# Altium PCB PCB1.PcbDoc (part 1 of 5)
Units mil, origin at the board's own origin, x right, y up, seen from the top; angles counter-clockwise.
Board outline 1280 x 1960 mil, 2 copper layers (Top Layer, Bottom Layer); 43 components, 63 nets, 300 pads, 93 vias.
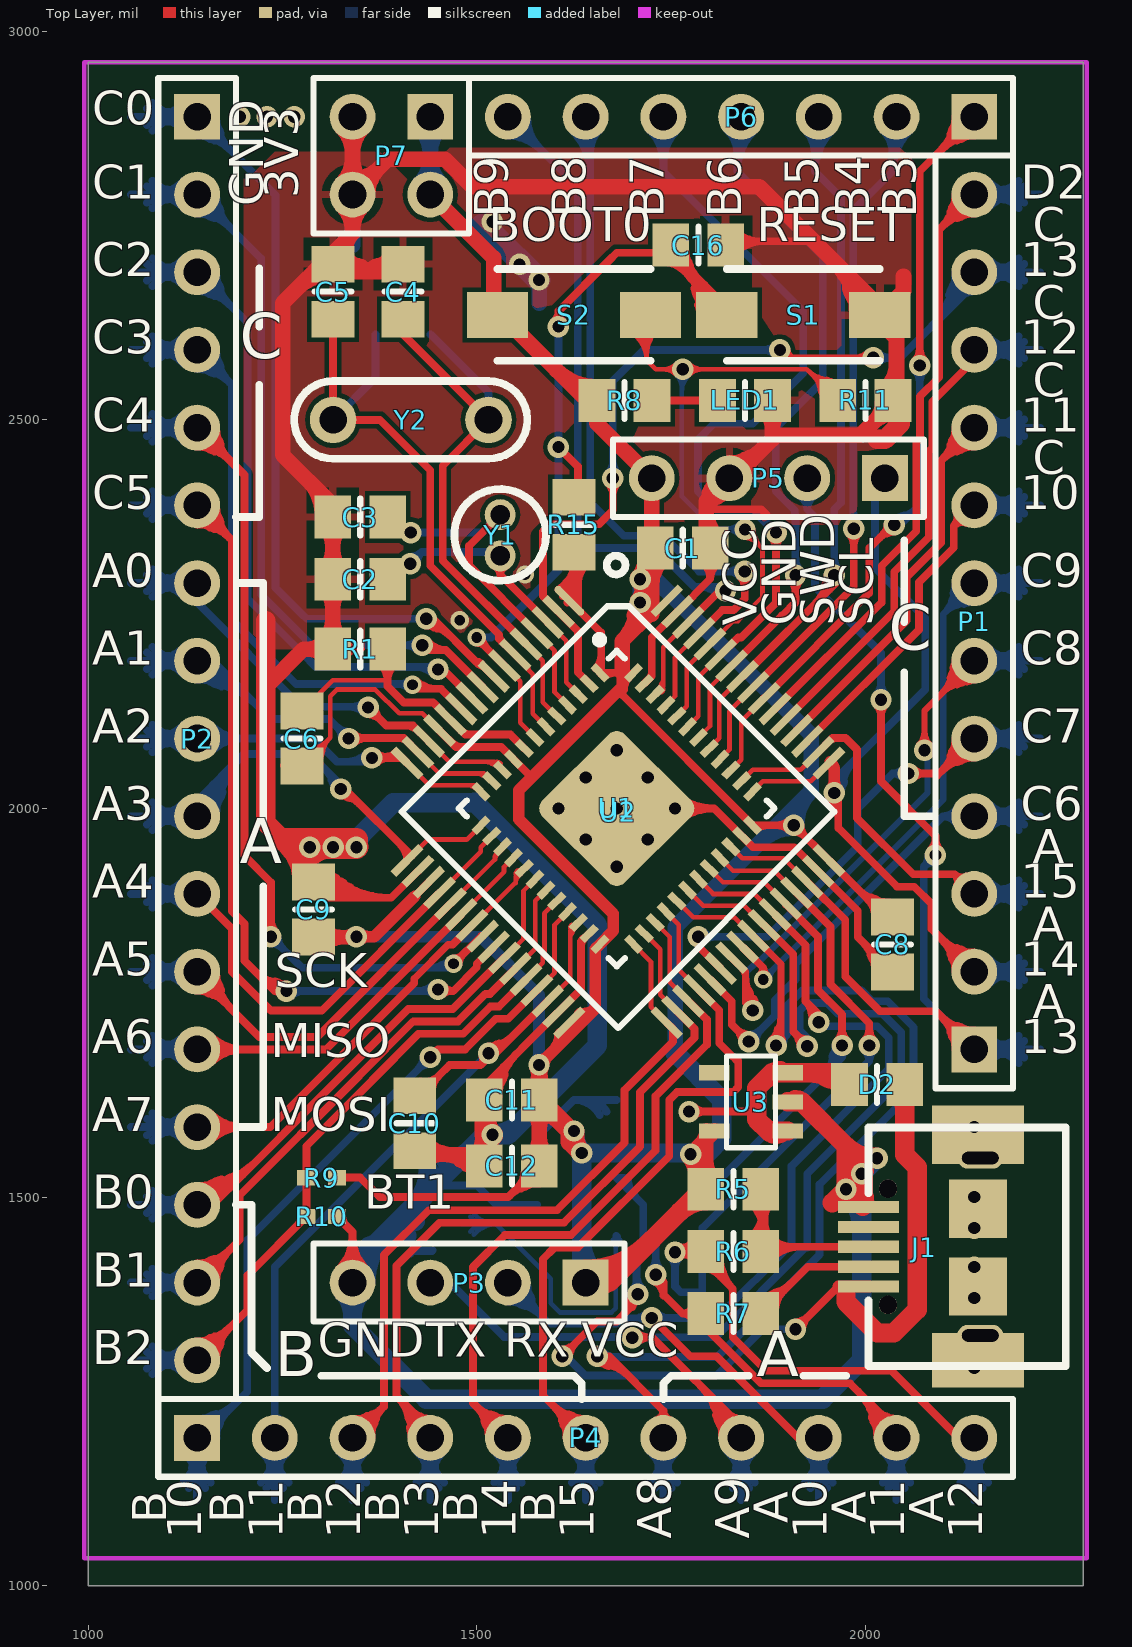
[diagram p0: Top Layer view]
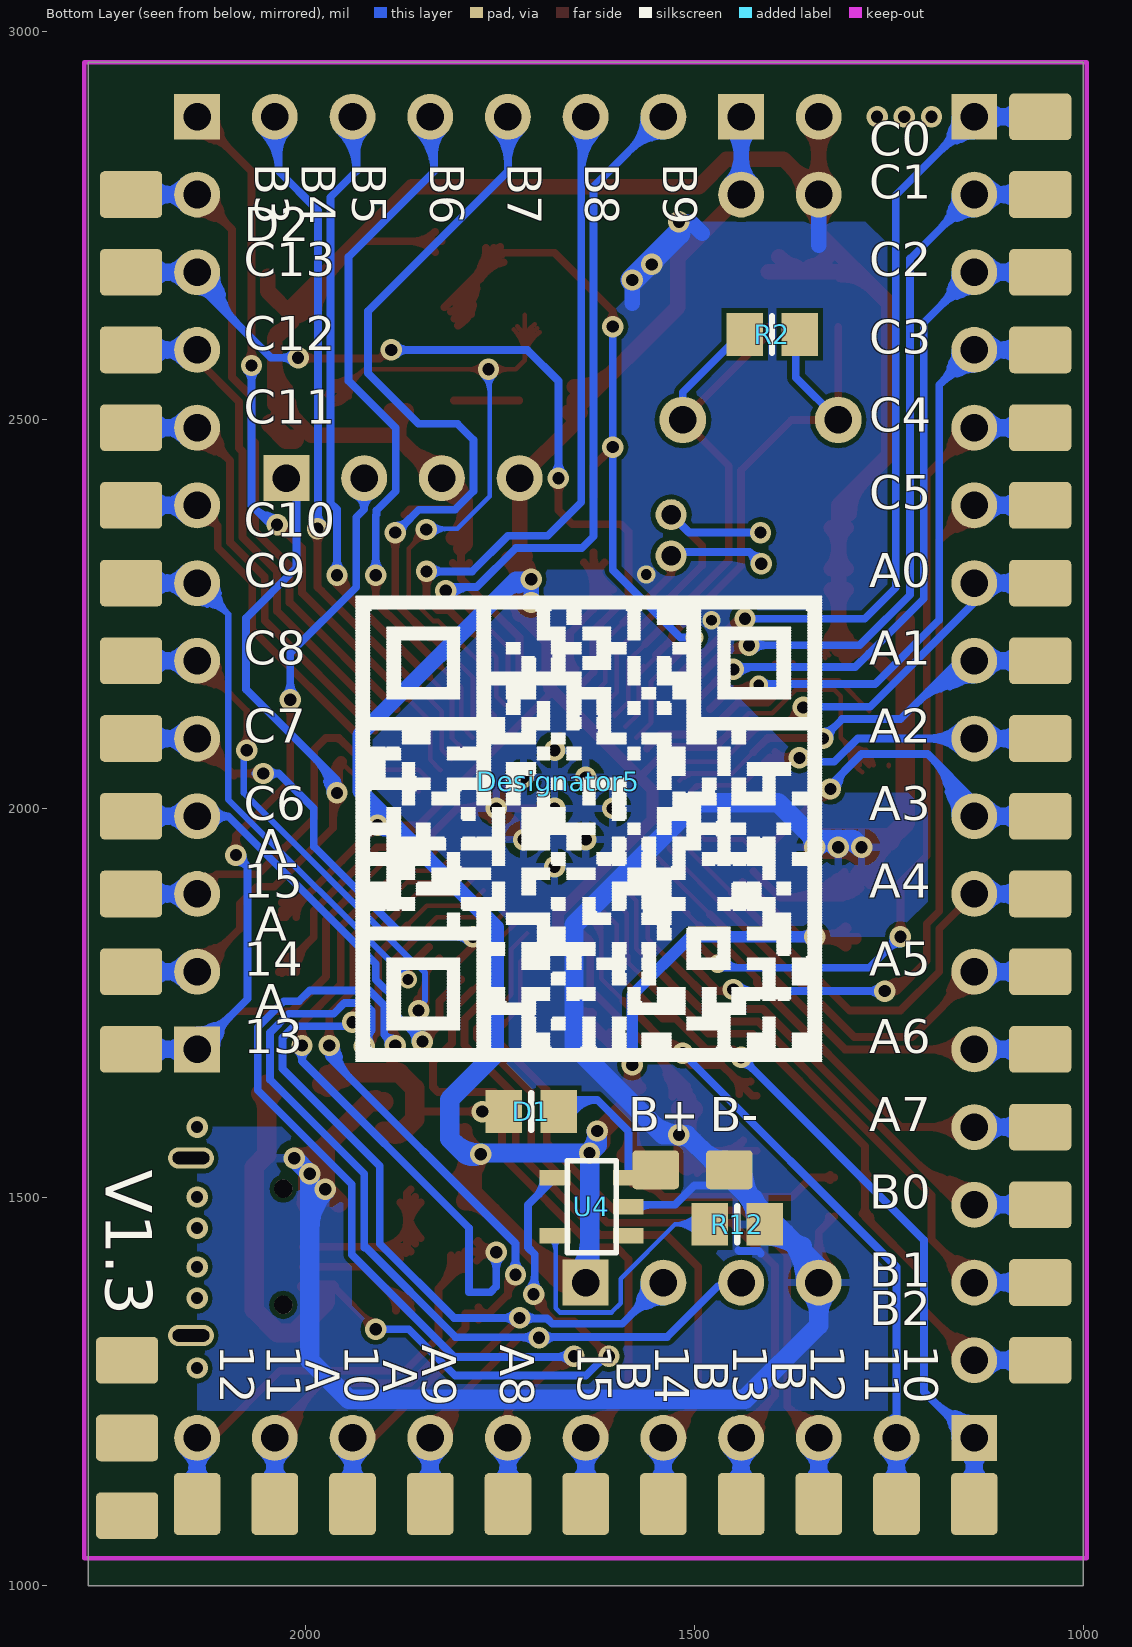
[diagram p1: Bottom Layer view, seen from below]

## Layer stack, top to bottom
Top Solder: solder mask 0.4, Solder Resist, Dk 3.5
Top Layer: signal copper 1.4
Dielectric 1: dielectric 12.6, FR-4, Dk 4.8
Bottom Layer: signal copper 1.4
Bottom Solder: solder mask 0.4, Solder Resist, Dk 3.5

## Board outline
1000,1000 2280,1000 2280,2960 1000,2960

## Design rules (kind name [scope] priority, off if disabled: settings)
Clearance [All] p1: gap=6
PolygonConnect [All] p1: connectstyle=Relief reliefconductorwidth=10 reliefentries=4 polygonreliefangle="90 Angle" airgapwidth=10
RoutingVias [All] p1: holewidth=15.75 width=27.56 viastyle="Through Hole" minholewidth=11.81 minwidth=23.62 maxholewidth=28 maxwidth=50
SolderMaskExpansion [All] p1: expansion=4
Width [All] p1: maxlimit=30 minlimit=6 preferedwidth=8
29 further rules are at their usual default settings.

## Components (designator, comment, footprint, x,y, rotation, side; value= is the part's Value field where it differs from the comment)
C1 "Cap" 6-0805_N 1765,2335 r0 top
C2 "Cap" 6-0805_N 1350,2295 r0 top
C3 "Cap" 6-0805_N 1350,2375 r0 top
C4 "Cap" 6-0805_N 1405,2665 r270 top
C5 "Cap" 6-0805_N 1315,2665 r270 top
C6 "Cap" 6-0805_N 1275,2090 r90 top
C8 "Cap" 6-0805_N 2035,1825 r270 top
C9 "Cap" 6-0805_N 1290,1870 r90 top
C10 "Cap" 6-0805_N 1420,1595 r90 top
C11 "Cap" 6-0805_N 1545,1625 r180 top
C12 "Cap" 6-0805_N 1545,1540 r180 top
C16 "Cap" 6-0805_N 1785,2725 r0 top
D1 "Diode" 6-0805_N 1710,1610 r0 bottom
D2 "Diode" 6-0805_N 2015,1645 r180 top
Designator5 "Comment" 二维码 1675,2035 r180 bottom
J1 "USB_M" usb-micro插 2120,1435 r270 top
LED1 "LED" 6-0805_N 1845,2525 r0 top
P1 "Header 12" HDR1X12 2140,1690 r90 top
P2 "Header 17" HDR1X17 1140,2890 r270 top
P3 "Header 4" HDR1X4 1640,1390 r180 top
P4 "Header 11" HDR1X11 1140,1190 r0 top
P5 "Header 4" HDR1X4 2025,2425 r180 top
P6 "Header 7" HDR1X7 2140,2890 r180 top
P7 "Header 2X2" HDR2X2 1440,2890 r180 top
R1 "0" 6-0805_N 1350,2205 r180 top
R2 "Res2" 6-0805_N 1400,2610 r180 bottom
R5 "Res2" 6-0805_N 1830,1510 r180 top
R6 "Res2" 6-0805_N 1830,1430 r0 top
R7 "Res2" 6-0805_N 1830,1350 r0 top
R8 "Res2" 6-0805_N 1690,2525 r0 top
R9 "Res2" 0402 1300.31,1525 r180 top
R10 "Res2" 0402 1300.31,1475 r180 top
R11 "Res2" 6-0805_N 2000,2525 r0 top
R12 "Res2" 6-0805_N 1445,1465 r0 bottom
R15 "Res2" 6-0805_N 1625,2365 r90 top
S1 "SW-PB" key 1920,2635 r180 top
S2 "SW-PB" key 1625,2635 r180 top
U1 "stm32f401ccu6" qfn48精简 1680,2000 r315 top
U2 "STM32F103RCT6" lqfd64正常 1665,1995 r315 top
U3 "ldo3.3v" sot23_5 1850,1625 r270 top
U4 "充电管理" sot23_5 1635,1490 r270 bottom
Y1 "33.768K" XTAL_32.768 1530,2325 r90 top
Y2 "8M" 晶振2 1415,2500 r0 top

## Footprints (in the part's own frame and the unit in brackets; to place one, negate y for a bottom-side part, rotate by r counter-clockwise, add the part's x,y. Pads: shape width x height; smd on the part's side, far side on the other; paste and mask are expansions set on the pad)
6-0805_N [mm] "Chip Resistor, Body 2.0x1.2mm, IPC Medium Density"
  rect 1.2x1.4 smd: 1(-0.9,0) 2(0.9,0)
  silkscreen extent 0,-0.6 0,0.6, body extent -1.07,-0.7 1.07,0.7, height 0.7
0402 [mm] "Chip Capacitor, Body 1.0x0.5mm, IPC High Density"
  rect 0.6x0.5 smd: 1(-0.5,0) 2(0.5,0)
  body extent -0.55,-0.3 0.55,0.3, height 1.3
HDR1X4 [mm] "Connector; Header; 4 Position"
  rect 1.5x1.5 hole 0.9: 1(0,0)
  round 1.5 hole 0.9: 2(2.54,0) 3(5.08,0) 4(7.62,0)
  silkscreen extent -1.27,-1.27 8.89,1.27
HDR1X7 [mm] "Connector; Header; 7 Position"
  rect 1.5x1.5 hole 0.9: 1(0,0)
  round 1.5 hole 0.9: 2(2.54,0) 3(5.08,0) 4(7.62,0) 5(10.16,0) 6(12.7,0) 7(15.24,0)
  silkscreen extent -1.27,-1.27 16.51,1.27
HDR1X11 [mm] "Connector; Header; 11 Position"
  rect 1.5x1.5 hole 0.9: 1(0,0)
  round 1.5 hole 0.9: 2(2.54,0) 3(5.08,0) 4(7.62,0) 5(10.16,0) 6(12.7,0) 7(15.24,0) 8(17.78,0) 9(20.32,0) 10(22.86,0) 11(25.4,0)
  silkscreen extent -1.27,-1.27 26.67,1.27
HDR1X12 [mm] "Connector; Header; 12 Position"
  rect 1.5x1.5 hole 0.9: 1(0,0)
  round 1.5 hole 0.9: 2(2.54,0) 3(5.08,0) 4(7.62,0) 5(10.16,0) 6(12.7,0) 7(15.24,0) 8(17.78,0) 9(20.32,0) 10(22.86,0) 11(25.4,0) 12(27.94,0)
  silkscreen extent -1.27,-1.27 29.21,1.27
HDR1X17 [mm] "Connector; Header; 17 Position"
  rect 1.5x1.5 hole 0.9: 1(0,0)
  round 1.5 hole 0.9: 2(2.54,0) 3(5.08,0) 4(7.62,0) 5(10.16,0) 6(12.7,0) 7(15.24,0) 8(17.78,0) 9(20.32,0) 10(22.86,0) 11(25.4,0) 12(27.94,0) 13(30.48,0) 14(33.02,0) 15(35.56,0) 16(38.1,0) 17(40.64,0)
  silkscreen extent -1.27,-1.27 41.91,1.27
HDR2X2 [mm] "Connector; Header; 2x2 Position"
  rect 1.5x1.5 hole 0.9: 1(0,0)
  round 1.5 hole 0.9: 2(0,2.54) 3(2.54,0) 4(2.54,2.54)
  silkscreen extent -1.27,-1.27 3.81,3.81
key [mm]
  rect 2x1.5 smd: 1(-2.5,0) 2(2.5,0)
  silkscreen extent -2.5,-1.5 2.5,1.5
lqfd64正常 [mil]
  oval 50x10 smd: 1(-225,160)
  rect 50x10 smd: 2(-225,140.31) 3(-225,120.63) 4(-225,100.94) 5(-225,81.26) 6(-225,61.57) 7(-225,41.89) 8(-225,22.2) 9(-225,2.52) 10(-225,-17.17) 11(-225,-36.85) 12(-225,-56.54) 13(-225,-76.22) 14(-225,-95.91) 15(-225,-115.59) 16(-225,-135.28) 33(247.44,-135.28) 34(247.44,-115.59) 35(247.44,-95.91) 36(247.44,-76.22) 37(247.44,-56.54) 38(247.44,-36.85) 39(247.44,-17.17) 40(247.44,2.52) 41(247.44,22.2) 42(247.44,41.89) 43(247.44,61.57) 44(247.44,81.26) 45(247.44,100.94) 46(247.44,120.63) 47(247.44,140.31) 48(247.44,160)
  rect 10x50 smd: 17(-136.42,-223.86) 18(-116.73,-223.86) 19(-97.05,-223.86) 20(-77.36,-223.86) 21(-57.68,-223.86) 22(-37.99,-223.86) 23(-18.31,-223.86) 24(1.38,-223.86) 25(21.06,-223.86) 26(40.75,-223.86) 27(60.43,-223.86) 28(80.12,-223.86) 29(99.8,-223.86) 30(119.49,-223.86) 31(139.17,-223.86) 32(158.86,-223.86) 49(158.86,248.58) 50(139.17,248.58) 51(119.49,248.58) 52(99.8,248.58) 53(80.12,248.58) 54(60.43,248.58) 55(40.75,248.58) 56(21.06,248.58) 57(1.38,248.58) 58(-18.31,248.58) 59(-37.99,248.58) 60(-57.68,248.58) 61(-77.36,248.58) 62(-97.05,248.58) 63(-116.73,248.58) 64(-136.42,248.58)
  silkscreen extent -227,-184 208,247
qfn48精简 [mm]
  rect 0.65x0.25 smd: 1(-3.525,2.75) 2(-3.525,2.25) 3(-3.525,1.75) 4(-3.525,1.25) 5(-3.525,0.75) 6(-3.525,0.25) 7(-3.525,-0.25) 8(-3.525,-0.75) 9(-3.525,-1.25) 10(-3.525,-1.75) 11(-3.525,-2.25) 12(-3.525,-2.75) 25(3.525,-2.75) 26(3.525,-2.25) 27(3.525,-1.75) 28(3.525,-1.25) 29(3.525,-0.75) 30(3.525,-0.25) 31(3.525,0.25) 32(3.525,0.75) 33(3.525,1.25) 34(3.525,1.75) 35(3.525,2.25) 36(3.525,2.75)
  rect 0.25x0.65 smd: 13(-2.75,-3.525) 14(-2.25,-3.525) 15(-1.75,-3.525) 16(-1.25,-3.525) 17(-0.75,-3.525) 18(-0.25,-3.525) 19(0.25,-3.525) 20(0.75,-3.525) 21(1.25,-3.525) 22(1.75,-3.525) 23(2.25,-3.525) 24(2.75,-3.525) 37(2.75,3.525) 38(2.25,3.525) 39(1.75,3.525) 40(1.25,3.525) 41(0.75,3.525) 42(0.25,3.525) 43(-0.25,3.525) 44(-0.75,3.525) 45(-1.25,3.525) 46(-1.75,3.525) 47(-2.25,3.525) 48(-2.75,3.525)
  silkscreen extent -4.42,-3.65 3.65,3.65
sot23_5 [mm]
  rect 0.5x1 smd: 1(1.016,1.27) 2(0.066,1.27) 3(-0.884,1.27) 4(-0.884,-1.13) 5(1.016,-1.13)
  silkscreen extent -1.43,-0.73 1.57,0.87, body extent -1.38,-1.33 1.52,1.47, height 1.09
usb-micro插 [mm]
  rect 1.905x3 smd: 0(-3.683,0.635)
  oval 0.7x1.5 hole 0.4 slot 1.2 at 90 deg: 0(-2.925,0.707) 0(2.875,0.707)
  round 0.6 hole 0.6: 0(-1.925,-2.311) 0(1.875,-2.311)
  rect 1.9x1.9 smd: 0(-1.27,0.635) 0(1.27,0.635)
  rect 1.778x3 smd: 0(3.683,0.635)
  rect 0.4x2 smd: 1(1.275,-2.943) 2(0.625,-2.943) 3(-0.025,-2.943) 4(-1.325,-2.943) 5(-0.675,-2.943)
  silkscreen extent -3.92,-2.95 3.87,3.5, body extent -3.92,-3.55 3.87,3.5, height 2.78
XTAL_32.768 [mil] "32.768k柱式晶振（未加焊）"
  round 40 hole 25: 1(0,0) 2(53,0)
  silkscreen extent -32,-59 86,59, body extent -33,-59 85,59, height 354
二维码 [mil]
  silkscreen extent -261,-360 339,238
晶振2 [mil]
  round 60 hole 35.43: 1(100,0) 2(-100,0)
  silkscreen extent -150,-50 150,50

## Part data
C1 C2 C3 C4 C5 C6 C8 C9 C10 C11 C12 C16: "Capacitor"
D1 D2: "Default Diode"
LED1: library part 发光二极管
P1: "Header, 12-Pin"
P2: "Header, 17-Pin"
P3 P5: "Header, 4-Pin"
P4: "Header, 11-Pin"
P6: "Header, 7-Pin"
P7: "Header, 2-Pin, Dual row"
R1: library part Res2, "Resistor"
R2 R5 R6 R7 R8 R9 R10 R11 R12 R15: "Resistor"
S1 S2: "Switch"
U1 U3 U4: library part Component_1
U2: library part STM32F103RDT6, "ST High-density performance line ARM-based 32-bit MCU with 256 to  512KB Flash, USB, CAN, 11 timers, 3 ADCs, 13 communication interfaces"
Y1 Y2: library part 晶振

## Free pads (board coordinates)
  rrect20% 80x60 smd far side: 1(1055,1290) 1(1055,1390) 1(1055,1490) 1(1055,1590) 1(1055,1690) 1(1055,1790) 1(1055,1890) 1(1055,1990) 1(1055,2090) 1(1055,2190) 1(1055,2290) 1(1055,2390) 1(1055,2490) 1(1055,2590) 1(1055,2690) 1(1055,2790) 1(1055,2890) 1(2225,1690) 1(2225,1790) 1(2225,1890) 1(2225,1990) 1(2225,2090) 1(2225,2190) 1(2225,2290) 1(2225,2390) 1(2225,2490) 1(2225,2590) 1(2225,2690) 1(2225,2790) 1(2230,1090) 1(2230,1190) 1(2230,1290)
  rrect20% 60x80 smd far side: 1(1140,1105) 1(1240,1105) 1(1340,1105) 1(1440,1105) 1(1540,1105) 1(1640,1105) 1(1740,1105) 1(1840,1105) 1(1940,1105) 1(2040,1105) 1(2140,1105)
  rrect20% 60x50 smd far side: 1(1455,1535) 1(1550,1535)
  rrect20% 150x150 smd rot 135: 1(1680,2000)

## Via types
v1: diameter 27.56, hole 15.75, Top Layer to Bottom Layer, tented both sides, 87 vias
v2: diameter 23.62, hole 13.78, Top Layer to Bottom Layer, tented both sides, 6 vias

## Nets (pads, with @x,y where several pads share a name; then routed paths per layer and width w, separated by ;. In a path a pad name is that pad's centre, name@x,y a point inside that pad or via, vN(x,y) a via of type N, cw(c..) or ccw(c..) an arc to the next point about the centre after c; other vN are vias at no path point)
BOOT0: R11.1 S2.1 U1.44 U2.60 | length 2206.8
  Top Layer w6: S2.1@1718.43,2635 1718.43,2576.57 1730,2565 v1(1765,2565) 1924.57,2565 ; U1.44@1757.25,2119.01 1770,2131.76 1770,2181.57 U2.60@1799.99,2211.56 1829.65,2241.22 1836.06,2241.22 1867.56,2272.72 1867.56,2334.44 1845,2356.99 v1@1845,2360 ; v1@1843.79,2358.84 ccw(c1859.81,2360.98) 1855.62,2345.37 ; v1@1845.32,2360.18 cw(c1840.18,2341.18) 1859.19,2346.28 ; 1934.57,2555 1924.57,2565 ; 1938.92,2547.7 ccw(c1968.07,2555.51) R11.1@1964.13,2525.59 ; 1939.74,2555.09 cw(c1931,2517.12) R11.1@1967.75,2530.06 ; R11.1@1941.24,2539.02 ccw(c1966.8,2545.87) R11.1@1963.34,2519.64 ; 1950.37,2552.65 cw(c1943.18,2521.41) R11.1@1973.41,2532.05 ; R11.1@1964.57,2525 1924.57,2565 ; 1738.98,2565 cw(c1738.98,2538.98) 1757.38,2557.38 ccw(c1738.98,2538.98) 1738.98,2565 ; 1738.98,2565 ccw(c1738.98,2591.02) 1757.38,2572.62 cw(c1738.98,2591.02) 1738.98,2565 ; 1791.02,2565 cw(c1791.02,2591.02) 1772.62,2572.62 ccw(c1791.02,2591.02) 1791.02,2565 ; 1791.02,2565 ccw(c1791.02,2538.98) 1772.62,2557.38 cw(c1791.02,2538.98) 1791.02,2565 ; 1924.57,2565 ccw(c1961.96,2602.38) 1963.84,2549.55 cw(c1961.96,2602.38) 1924.57,2565 ; S2.1@1698.87,2612.93 cw(c1674.49,2576.38) 1718.43,2576.38 ccw(c1674.49,2576.38) S2.1@1698.87,2612.93 ; S2.1@1702.19,2617.92 cw(c1681.97,2587.59) 1718.43,2587.59 ccw(c1681.97,2587.59) S2.1@1702.19,2617.92 ; S2.1@1705.52,2622.91 cw(c1689.45,2598.8) 1718.43,2598.8 ccw(c1689.45,2598.8) S2.1@1705.52,2622.91 ; 1718.43,2582.65 cw(c1765.93,2582.65) 1732.34,2616.24 ccw(c1765.93,2582.65) 1718.43,2582.65 ; 1718.43,2597.13 cw(c1751.45,2597.13) 1728.1,2620.48 ccw(c1751.45,2597.13) 1718.43,2597.13 ; v1@1845,2348.22 cw(c1845,2327.04) 1859.98,2342.02 ccw(c1845,2327.04) v1@1845,2348.22 ; v1@1849.78,2359 ccw(c1866.16,2359) 1854.58,2347.42 cw(c1866.16,2359) v1@1849.78,2359 ; v1@1855.78,2359 ccw(c1886.64,2359) 1864.82,2337.18 cw(c1886.64,2359) v1@1855.78,2359 ; 1932.15,2557.42 cw(c1903.66,2528.94) 1943.95,2528.94 ccw(c1903.66,2528.94) 1932.15,2557.42 ; 1934.32,2555.25 ccw(c1962.63,2583.56) 1964.05,2543.55 cw(c1962.63,2583.56) 1934.32,2555.25 ; R11.1@1942.39,2547.18 cw(c1924.15,2528.94) 1949.95,2528.94 ccw(c1924.15,2528.94) R11.1@1942.39,2547.18 ; R11.1@1944.07,2545.5 ccw(c1963.3,2564.73) 1964.26,2537.55 cw(c1963.3,2564.73) R11.1@1944.07,2545.5
  Bottom Layer w6: v1(1765,2565) 1763.53,2563.53 1763.53,2401.47 1805,2360 v1@1845,2360 ; v1@1757.38,2557.38 cw(c1742.53,2542.53) 1763.53,2542.53 ccw(c1742.53,2542.53) v1@1757.38,2557.38 ; 1763.53,2535.42 cw(c1794.58,2535.42) 1772.62,2557.38 ccw(c1794.58,2535.42) 1763.53,2535.42 ; 1763.53,2549.91 cw(c1780.09,2549.91) 1768.38,2561.62 ccw(c1780.09,2549.91) 1763.53,2549.91 ; 1816.56,2360 cw(c1816.56,2330.56) 1837.38,2351.38 ccw(c1816.56,2330.56) 1816.56,2360 ; 1821.39,2360 ccw(c1821.39,2382.61) 1837.38,2366.62 cw(c1821.39,2382.61) 1821.39,2360 ; 1831.05,2360 cw(c1831.05,2345.05) 1841.62,2355.62 ccw(c1831.05,2345.05) 1831.05,2360
  other v1: 1845,2359
BOOT1: P2.17 pad.1@1055,1290 R9.2 R10.2 U1.20 U2.28 | length 2355.7
  Top Layer w6: U2.28@1563.36,1780.06 1585,1801.7 1585,1810.57 1587,1812.57 1587,1865.24 U1.20@1602.75,1880.99
  Top Layer w10: P2.17@1134.64,1291.1 cw(c1172.3,1283.39) 1162.35,1320.52 ; P2.17@1140,1290 1205,1355 1205,1399.37 R10.2@1280.63,1475 R9.2@1280.63,1525 1280.63,1565.37 1365,1649.75 1365,1650 1425,1710 1482.33,1710 1517.65,1745.32 1528.63,1745.32 U2.28@1563.36,1780.06 ; P2.17@1141.1,1284.64 ccw(c1133.39,1322.3) 1170.52,1312.35 ; 1164.8,1314.8 cw(c1140,1339.6) 1140,1304.53 ccw(c1140,1339.6) 1164.8,1314.8 ; 1164.8,1314.8 ccw(c1189.6,1290) 1154.53,1290 cw(c1189.6,1290) 1164.8,1314.8 ; 1181.87,1331.87 cw(c1140,1373.74) 1140,1314.53 ccw(c1140,1373.74) 1181.87,1331.87 ; 1181.87,1331.87 ccw(c1223.74,1290) 1164.53,1290 cw(c1223.74,1290) 1181.87,1331.87 ; 1280.63,1486.69 cw(c1268.94,1486.69) 1277.2,1478.42 ccw(c1268.94,1486.69) 1280.63,1486.69 ; 1280.63,1486.69 ccw(c1292.32,1486.69) 1284.05,1478.42 cw(c1292.32,1486.69) 1280.63,1486.69 ; 1280.63,1513.31 cw(c1292.32,1513.31) 1284.05,1521.58 ccw(c1292.32,1513.31) 1280.63,1513.31 ; 1280.63,1513.31 ccw(c1268.94,1513.31) 1277.2,1521.58 cw(c1268.94,1513.31) 1280.63,1513.31 ; 1280.63,1536.69 cw(c1268.94,1536.69) 1277.2,1528.42 ccw(c1268.94,1536.69) 1280.63,1536.69 ; 1280.63,1536.69 ccw(c1292.32,1536.69) 1284.05,1528.42 cw(c1292.32,1536.69) 1280.63,1536.69 ; 1269,1463.37 ccw(c1257.37,1475) 1273.82,1475 cw(c1257.37,1475) 1269,1463.37
  Bottom Layer w10: pad.1@1055,1290 P2.17@1140,1290 ; P2.17@1116.78,1282.1 ccw(c1095.78,1274.96) 1101.52,1296.39 ccw(c1105.72,1312.07) P2.17@1119.38,1303.28 ; P2.17@1116.78,1297.9 cw(c1095.78,1305.04) 1101.52,1283.61 cw(c1105.72,1267.93) P2.17@1119.38,1276.72 ; pad.1@1080.79,1290 cw(c1080.79,1230.79) 1122.66,1272.66 ccw(c1080.79,1230.79) pad.1@1080.79,1290 ; pad.1@1080.79,1290 ccw(c1080.79,1349.21) 1122.66,1307.34 cw(c1080.79,1349.21) pad.1@1080.79,1290 ; pad.1@1086.36,1277.01 cw(c1099.56,1268.97) 1103.56,1283.9 ; pad.1@1086.36,1277.01 cw(c1099.56,1268.97) 1103.56,1283.9 ; pad.1@1086.36,1277.01 cw(c1099.56,1268.97) 1103.56,1283.9 ; pad.1@1086.36,1302.99 ccw(c1099.56,1311.03) 1103.56,1296.1 ; pad.1@1086.36,1302.99 ccw(c1099.56,1311.03) 1103.56,1296.1 ; pad.1@1086.36,1302.99 ccw(c1099.56,1311.03) 1103.56,1296.1 ; pad.1@1088.73,1282.12 cw(c1109.12,1275.35) 1103.56,1296.1 ; pad.1@1088.73,1282.12 cw(c1109.12,1275.35) 1103.56,1296.1 ; pad.1@1088.73,1282.12 cw(c1109.12,1275.35) 1103.56,1296.1 ; pad.1@1088.73,1297.88 ccw(c1109.12,1304.65) 1103.56,1283.9 ; pad.1@1088.73,1297.88 ccw(c1109.12,1304.65) 1103.56,1283.9 ; pad.1@1088.73,1297.88 ccw(c1109.12,1304.65) 1103.56,1283.9 ; 1101.21,1290 cw(c1101.21,1326.21) 1075.61,1300.61 ccw(c1101.21,1326.21) 1101.21,1290 ; 1101.21,1290 ccw(c1101.21,1253.79) 1075.61,1279.39 cw(c1101.21,1253.79) 1101.21,1290 ; 1104.93,1290 cw(c1104.93,1254.93) 1129.73,1279.73 ccw(c1104.93,1254.93) 1104.93,1290 ; 1104.93,1290 ccw(c1104.93,1325.07) 1129.73,1300.27 cw(c1104.93,1325.07) 1104.93,1290 ; P2.17@1125.36,1290 cw(c1125.36,1350.36) 1082.68,1307.68 ccw(c1125.36,1350.36) P2.17@1125.36,1290 ; P2.17@1125.36,1290 ccw(c1125.36,1229.64) 1082.68,1272.32 cw(c1125.36,1229.64) P2.17@1125.36,1290
FCS: P2.11 pad.1@1055,1890 U1.14 U2.20 | length 1594.3
  Top Layer w6: U2.20@1452,1891.41 1505,1944.41 1505,1950 1519.23,1964.23 U1.14@1519.23,1964.51 ; 1510.19,1955.19 ccw(c1506.44,1958.94) 1511.74,1958.94 cw(c1506.44,1958.94) 1510.19,1955.19
  Top Layer w10: P2.11@1140,1890 1185,1845 1185,1790 1235,1740 1300,1740 1300.3,1739.7 U2.20@1452,1891.41
  Bottom Layer w10: pad.1@1055,1890 P2.11@1140,1890 ; P2.11@1116.78,1882.1 ccw(c1095.78,1874.96) 1101.52,1896.39 ccw(c1105.72,1912.07) P2.11@1119.38,1903.28 ; P2.11@1116.78,1897.9 cw(c1095.78,1905.04) 1101.52,1883.61 cw(c1105.72,1867.93) P2.11@1119.38,1876.72 ; pad.1@1080.79,1890 cw(c1080.79,1830.79) 1122.66,1872.66 ccw(c1080.79,1830.79) pad.1@1080.79,1890 ; pad.1@1080.79,1890 ccw(c1080.79,1949.21) 1122.66,1907.34 cw(c1080.79,1949.21) pad.1@1080.79,1890 ; pad.1@1086.36,1877.01 cw(c1099.56,1868.97) 1103.56,1883.9 ; pad.1@1086.36,1877.01 cw(c1099.56,1868.97) 1103.56,1883.9 ; pad.1@1086.36,1877.01 cw(c1099.56,1868.97) 1103.56,1883.9 ; pad.1@1086.36,1902.99 ccw(c1099.56,1911.03) 1103.56,1896.1 ; pad.1@1086.36,1902.99 ccw(c1099.56,1911.03) 1103.56,1896.1 ; pad.1@1086.36,1902.99 ccw(c1099.56,1911.03) 1103.56,1896.1 ; pad.1@1088.73,1882.12 cw(c1109.12,1875.35) 1103.56,1896.1 ; pad.1@1088.73,1882.12 cw(c1109.12,1875.35) 1103.56,1896.1 ; pad.1@1088.73,1882.12 cw(c1109.12,1875.35) 1103.56,1896.1 ; pad.1@1088.73,1897.88 ccw(c1109.12,1904.65) 1103.56,1883.9 ; pad.1@1088.73,1897.88 ccw(c1109.12,1904.65) 1103.56,1883.9 ; pad.1@1088.73,1897.88 ccw(c1109.12,1904.65) 1103.56,1883.9 ; 1101.21,1890 cw(c1101.21,1926.21) 1075.61,1900.61 ccw(c1101.21,1926.21) 1101.21,1890 ; 1101.21,1890 ccw(c1101.21,1853.79) 1075.61,1879.39 cw(c1101.21,1853.79) 1101.21,1890 ; 1104.93,1890 cw(c1104.93,1854.93) 1129.73,1879.73 ccw(c1104.93,1854.93) 1104.93,1890 ; 1104.93,1890 ccw(c1104.93,1925.07) 1129.73,1900.27 cw(c1104.93,1925.07) 1104.93,1890 ; P2.11@1125.36,1890 cw(c1125.36,1950.36) 1082.68,1907.68 ccw(c1125.36,1950.36) P2.11@1125.36,1890 ; P2.11@1125.36,1890 ccw(c1125.36,1829.64) 1082.68,1872.32 cw(c1125.36,1829.64) P2.11@1125.36,1890
GND: C1.2 C2.1 C3.1 C4.1 C5.1 C8.2 C9.2 C10.1 C11.2 C12.2 C16.2 J1.4 LED1.2 P3.4 P5.3 P7.3 P7.4 pad.1@1455,1535 pad.1@1680,2000 R1.2 R10.1 R11.2 R12.1 S1.1 U1.23 U1.35 U1.47 U2.18 U2.31 U2.47 U2.63 U3.2 U4.2 | length 19378.9
  Top Layer w6: R1.2@1314.57,2205 1352.81,2205 ; R1.2@1326.78,2196.97 cw(c1341.68,2187.17) 1341.68,2205 cw(c1341.68,2222.83) R1.2@1326.78,2213.03 ; R1.2@1331.8,2193.67 cw(c1352.81,2179.85) 1352.81,2205 ; R1.2@1331.8,2216.33 ccw(c1352.81,2230.15) 1352.81,2205
  Top Layer w10: C9.2@1290,1905.43 1310.43,1885 1389.92,1885 U2.18@1424.17,1919.25 ; C9.2@1292.86,1906.3 cw(c1308.32,1893.9) 1319.38,1910.33 ; C9.2@1298.58,1898.17 cw(c1310.85,1879) 1322.24,1898.71 ; C9.2@1300.66,1900.04 cw(c1316.83,1887.08) 1328.4,1904.26 ; C9.2@1301.17,1888.27 cw(c1310.89,1865.19) 1323.41,1886.88 cw(c1334.26,1905.68) C9.2@1312.56,1905.55 ; C9.2@1303.97,1889.75 cw(c1320.84,1863.4) 1336.47,1890.49 ; C9.2@1308.46,1893.78 cw(c1325.34,1880.25) 1337.42,1898.19 ; C9.2@1311.92,1910.25 ccw(c1327.88,1914.53) 1319.62,1900.22 ; R10.1@1320,1475 1340,1455 P3.4@1340,1390 ; C10.1@1420,1559.57 1490.87,1559.57 C12.2@1510,1540.43 ; C10.1@1433.26,1543.45 cw(c1457.05,1502.28) 1469.33,1548.21 ; C10.1@1440.06,1568.89 ccw(c1476.74,1590.09) 1465.8,1549.16 ; 1466.69,1549.42 ccw(c1477.69,1566.95) C12.2@1494.47,1554.84 ; 1474.38,1554.64 ccw(c1483.71,1570.8) C12.2@1496.65,1557.35 ; 1475.72,1543.75 ccw(c1486.36,1560.69) C12.2@1502.57,1548.98 ; 1483.88,1549.15 cw(c1475.62,1534.84) C12.2@1491.58,1539.12 ; 1484.76,1538.08 ccw(c1495.02,1554.43) C12.2@1510.68,1543.13 ; 1485.89,1547.99 ccw(c1493.3,1560.83) C12.2@1503.59,1550.15 ; C11.2@1507.65,1637.34 ccw(c1502.52,1659.92) 1524.89,1653.93 ; C11.2@1509.57,1625 1509.57,1642.75 U2.31@1605.12,1738.3 1634,1767.18 1634,1828.72 U1.23@1644.51,1839.23 ; C11.2@1510.12,1627.68 ccw(c1491.54,1669.7) 1535.92,1657.81 ; C11.2@1524.04,1650.79 ccw(c1540,1646.51) C11.2@1525.69,1638.25 ; v1(1680,2000) 1805.28,2000 U1.35@1840.77,1964.51 1855.28,1950 1908.43,1950 U2.47@1939.18,1919.25 1990,1868.43 1990,1834.57 C8.2@2035,1789.57 ; U1.47@1715.49,2160.77 1725.1,2170.38 1725.1,2220.19 U2.63@1758.23,2253.32 1758.32,2253.32 1800.43,2295.43 ; pad.1@1718.78,1959.98 cw(c1733.23,1960.2) pad.1@1726.51,1973 ; pad.1@1718.78,2040.02 ccw(c1733.23,2039.8) pad.1@1726.51,2027 ; pad.1@1718.86,1960.43 cw(c1735.46,1954.15) pad.1@1731.35,1971.42 ; pad.1@1718.86,2039.57 ccw(c1735.46,2045.85) pad.1@1731.35,2028.58 ; pad.1@1742.18,1987.37 cw(c1763.38,1980.77) pad.1@1754.51,2001.12 ; pad.1@1742.18,2012.63 ccw(c1763.38,2019.23) pad.1@1754.51,1998.88 ; 1795,2384.94 1865.97,2384.94 1872.94,2377.98 ; C1.2@1800.43,2335 1800.43,2295.43 ; C16.2@1825.43,2730 1933.43,2730 ; 2006.15,1813.03 ccw(c2040.15,1822.14) C8.2@2030.69,1788.24 ; 1340,1425.07 cw(c1304.93,1425.07) 1329.73,1400.27 ccw(c1304.93,1425.07) 1340,1425.07 ; 1340,1425.07 ccw(c1375.07,1425.07) 1350.27,1400.27 cw(c1375.07,1425.07) 1340,1425.07 ; 1340,1449.21 cw(c1280.79,1449.21) 1322.66,1407.34 ccw(c1280.79,1449.21) 1340,1449.21 ; 1340,1449.21 ccw(c1399.21,1449.21) 1357.34,1407.34 cw(c1399.21,1449.21) 1340,1449.21 ; 1468.89,1559.57 cw(c1468.89,1604.53) 1437.1,1572.74 ccw(c1468.89,1604.53) 1468.89,1559.57 ; 1468.89,1559.57 ccw(c1468.89,1514.61) 1437.1,1546.4 cw(c1468.89,1514.61) 1468.89,1559.57 ; pad.1@1701.2,2000 cw(c1701.2,2021.2) 1686.21,2006.21 ccw(c1701.2,2021.2) pad.1@1701.2,2000 ; pad.1@1701.2,2000 ccw(c1701.2,1978.8) 1686.21,1993.79 cw(c1701.2,1978.8) pad.1@1701.2,2000 ; pad.1@1718.07,1968.56 ccw(c1709.6,2006.16) pad.1@1742.17,1985.57 ; pad.1@1718.07,1968.56 ccw(c1709.6,2006.16) pad.1@1742.17,1985.57 ; pad.1@1718.07,1968.56 ccw(c1709.6,2006.16) pad.1@1742.17,1985.57 ; pad.1@1718.07,1968.56 ccw(c1709.6,2006.16) pad.1@1742.17,1985.57 ; pad.1@1718.07,2031.44 cw(c1709.6,1993.84) pad.1@1742.17,2014.43 ; pad.1@1718.07,2031.44 cw(c1709.6,1993.84) pad.1@1742.17,2014.43 ; pad.1@1718.07,2031.44 cw(c1709.6,1993.84) pad.1@1742.17,2014.43 ; pad.1@1718.07,2031.44 cw(c1709.6,1993.84) pad.1@1742.17,2014.43 ; pad.1@1720.25,1968.78 ccw(c1720.98,1994.77) pad.1@1738.84,1975.87 ; pad.1@1720.25,1968.78 ccw(c1720.98,1994.77) pad.1@1738.84,1975.87 ; pad.1@1720.25,1968.78 ccw(c1720.98,1994.77) pad.1@1738.84,1975.87 ; pad.1@1720.25,2031.22 cw(c1720.98,2005.23) pad.1@1738.84,2024.13 ; pad.1@1720.25,2031.22 cw(c1720.98,2005.23) pad.1@1738.84,2024.13 ; pad.1@1720.25,2031.22 cw(c1720.98,2005.23) pad.1@1738.84,2024.13 ; pad.1@1723.3,1968.13 ccw(c1726.34,1975.6) pad.1@1733.15,1971.29 ; pad.1@1723.3,1968.13 ccw(c1726.34,1975.6) pad.1@1733.15,1971.29 ; pad.1@1723.3,1968.13 ccw(c1726.34,1975.6) pad.1@1733.15,1971.29 ; pad.1@1723.3,1968.13 ccw(c1726.34,1975.6) pad.1@1733.15,1971.29 ; pad.1@1723.3,2031.87 cw(c1726.34,2024.4) pad.1@1733.15,2028.71 ; pad.1@1723.3,2031.87 cw(c1726.34,2024.4) pad.1@1733.15,2028.71 ; pad.1@1723.3,2031.87 cw(c1726.34,2024.4) pad.1@1733.15,2028.71 ; pad.1@1723.3,2031.87 cw(c1726.34,2024.4) pad.1@1733.15,2028.71 ; pad.1@1724.29,1967.66 ccw(c1727.09,1972.67) pad.1@1731.04,1968.5 ; pad.1@1724.29,1967.66 ccw(c1727.09,1972.67) pad.1@1731.04,1968.5 ; pad.1@1724.29,1967.66 ccw(c1727.09,1972.67) pad.1@1731.04,1968.5 ; pad.1@1724.29,2032.34 cw(c1727.09,2027.33) pad.1@1731.04,2031.5 ; pad.1@1724.29,2032.34 cw(c1727.09,2027.33) pad.1@1731.04,2031.5 ; pad.1@1724.29,2032.34 cw(c1727.09,2027.33) pad.1@1731.04,2031.5 ; pad.1@1728.66,1961.43 cw(c1736.5,1962.73) pad.1@1731.04,1968.5 ; pad.1@1728.66,1961.43 cw(c1736.5,1962.73) pad.1@1731.04,1968.5 ; pad.1@1728.66,1961.43 cw(c1736.5,1962.73) pad.1@1731.04,1968.5 ; pad.1@1728.66,2038.57 ccw(c1736.5,2037.27) pad.1@1731.04,2031.5 ; pad.1@1728.66,2038.57 ccw(c1736.5,2037.27) pad.1@1731.04,2031.5 ; pad.1@1728.66,2038.57 ccw(c1736.5,2037.27) pad.1@1731.04,2031.5 ; pad.1@1728.78,1959.75 cw(c1745.15,1959.29) pad.1@1733.9,1971.2 ; pad.1@1728.78,1959.75 cw(c1745.15,1959.29) pad.1@1733.9,1971.2 ; pad.1@1728.78,1959.75 cw(c1745.15,1959.29) pad.1@1733.9,1971.2 ; pad.1@1728.78,2040.25 ccw(c1745.15,2040.71) pad.1@1733.9,2028.8 ; pad.1@1728.78,2040.25 ccw(c1745.15,2040.71) pad.1@1733.9,2028.8 ; pad.1@1728.78,2040.25 ccw(c1745.15,2040.71) pad.1@1733.9,2028.8 ; pad.1@1731.86,1969.26 ccw(c1701.51,2002.15) pad.1@1746.23,2000.35 ; pad.1@1731.86,1969.26 ccw(c1701.51,2002.15) pad.1@1746.23,2000.35 ; pad.1@1731.86,1969.26 ccw(c1701.51,2002.15) pad.1@1746.23,2000.35 ; pad.1@1731.86,2030.74 cw(c1701.51,1997.85) pad.1@1746.23,1999.65 ; pad.1@1731.86,2030.74 cw(c1701.51,1997.85) pad.1@1746.23,1999.65 ; pad.1@1731.86,2030.74 cw(c1701.51,1997.85) pad.1@1746.23,1999.65 ; pad.1@1733.8,2000 cw(c1733.8,1978.8) 1748.79,1993.79 ccw(c1733.8,1978.8) pad.1@1733.8,2000 ; pad.1@1733.8,2000 ccw(c1733.8,2021.2) 1748.79,2006.21 cw(c1733.8,2021.2) pad.1@1733.8,2000 ; pad.1@1736.31,1984.18 ccw(c1720.75,2004.75) pad.1@1746.3,2001.21 ; pad.1@1736.31,1984.18 ccw(c1720.75,2004.75) pad.1@1746.3,2001.21 ; pad.1@1736.31,1984.18 ccw(c1720.75,2004.75) pad.1@1746.3,2001.21 ; pad.1@1736.31,2015.82 cw(c1720.75,1995.25) pad.1@1746.3,1998.79 ; pad.1@1736.31,2015.82 cw(c1720.75,1995.25) pad.1@1746.3,1998.79 ; pad.1@1736.31,2015.82 cw(c1720.75,1995.25) pad.1@1746.3,1998.79 ; pad.1@1740.18,1964.34 ccw(c1719.45,1985.49) pad.1@1746.87,1996.68 ; pad.1@1740.18,1964.34 ccw(c1719.45,1985.49) pad.1@1746.87,1996.68 ; pad.1@1740.18,1964.34 ccw(c1719.45,1985.49) pad.1@1746.87,1996.68 ; pad.1@1740.18,2035.66 cw(c1719.45,2014.51) pad.1@1746.87,2003.32 ; pad.1@1740.18,2035.66 cw(c1719.45,2014.51) pad.1@1746.87,2003.32 ; pad.1@1740.18,2035.66 cw(c1719.45,2014.51) pad.1@1746.87,2003.32 ; pad.1@1741.5,1988.1 cw(c1751.51,1974.87) pad.1@1753.79,1991.3 ; pad.1@1741.5,1988.1 cw(c1751.51,1974.87) pad.1@1753.79,1991.3 ; pad.1@1741.5,1988.1 cw(c1751.51,1974.87) pad.1@1753.79,1991.3 ; pad.1@1741.5,2011.9 ccw(c1751.51,2025.13) pad.1@1753.79,2008.7 ; pad.1@1741.5,2011.9 ccw(c1751.51,2025.13) pad.1@1753.79,2008.7 ; pad.1@1741.5,2011.9 ccw(c1751.51,2025.13) pad.1@1753.79,2008.7 ; pad.1@1749.6,1985.63 ccw(c1735.62,2000.78) pad.1@1756.22,1999.95 ; pad.1@1749.6,1985.63 ccw(c1735.62,2000.78) pad.1@1756.22,1999.95 ; pad.1@1749.6,1985.63 ccw(c1735.62,2000.78) pad.1@1756.22,1999.95 ; pad.1@1749.6,2014.37 cw(c1735.62,1999.22) pad.1@1756.22,2000.05 ; pad.1@1749.6,2014.37 cw(c1735.62,1999.22) pad.1@1756.22,2000.05 ; pad.1@1749.6,2014.37 cw(c1735.62,1999.22) pad.1@1756.22,2000.05 ; pad.1@1750.81,1974.75 ccw(c1734.34,1991.57) pad.1@1756.13,2000.46 ; pad.1@1750.81,1974.75 ccw(c1734.34,1991.57) pad.1@1756.13,2000.46 ; pad.1@1750.81,1974.75 ccw(c1734.34,1991.57) pad.1@1756.13,2000.46 ; pad.1@1750.81,2025.25 cw(c1734.34,2008.43) pad.1@1756.13,1999.54 ; pad.1@1750.81,2025.25 cw(c1734.34,2008.43) pad.1@1756.13,1999.54 ; pad.1@1750.81,2025.25 cw(c1734.34,2008.43) pad.1@1756.13,1999.54 ; pad.1@1761.44,1985.17 ccw(c1749.22,1997.64) pad.1@1765.39,2004.24 ; pad.1@1761.44,1985.17 ccw(c1749.22,1997.64) pad.1@1765.39,2004.24 ; pad.1@1761.44,1985.17 ccw(c1749.22,1997.64) pad.1@1765.39,2004.24 ; pad.1@1761.44,2014.83 cw(c1749.22,2002.36) pad.1@1765.39,1995.76 ; pad.1@1761.44,2014.83 cw(c1749.22,2002.36) pad.1@1765.39,1995.76 ; pad.1@1761.44,2014.83 cw(c1749.22,2002.36) pad.1@1765.39,1995.76 ; pad.1@1763.5,1997.79 cw(c1771.11,1995.81) pad.1@1772.95,2003.46 ; pad.1@1763.5,1997.79 cw(c1771.11,1995.81) pad.1@1772.95,2003.46 ; pad.1@1763.5,1997.79 cw(c1771.11,1995.81) pad.1@1772.95,2003.46 ; pad.1@1763.5,2002.21 ccw(c1771.11,2004.19) pad.1@1772.95,1996.54 ; pad.1@1763.5,2002.21 ccw(c1771.11,2004.19) pad.1@1772.95,1996.54 ; pad.1@1763.5,2002.21 ccw(c1771.11,2004.19) pad.1@1772.95,1996.54 ; pad.1@1769.48,2000 cw(c1769.48,2055.07) 1722.58,2026.21 ccw(c1769.48,2055.07) pad.1@1769.48,2000 ; pad.1@1769.48,2000 ccw(c1769.48,1944.93) 1722.58,1973.79 cw(c1769.48,1944.93) pad.1@1769.48,2000 ; pad.1@1776.2,2000 cw(c1776.2,2021.2) 1761.21,2006.21 ccw(c1776.2,2021.2) pad.1@1776.2,2000 ; pad.1@1776.2,2000 ccw(c1776.2,1978.8) 1761.21,1993.79 cw(c1776.2,1978.8) pad.1@1776.2,2000 ; 1787.38,2000 cw(c1787.38,2066.08) 1731.1,2031.45 ccw(c1787.38,2066.08) 1787.38,2000 ; 1787.38,2000 ccw(c1787.38,1933.92) 1731.1,1968.55 cw(c1787.38,1933.92) 1787.38,2000 ; 1800.43,2295.44 cw(c1825.2,2295.44) 1811.06,2315.77 ccw(c1825.2,2295.44) 1800.43,2295.44 ; 1800.43,2295.44 ccw(c1775.66,2295.44) 1789.8,2315.77 cw(c1775.66,2295.44) 1800.43,2295.44 ; 1805.27,2000 cw(c1805.27,2077.09) 1739.62,2036.69 ccw(c1805.27,2077.09) 1805.27,2000 ; 1805.27,2000 ccw(c1805.27,1922.91) 1739.62,1963.31 cw(c1805.27,1922.91) 1805.27,2000 ; C9.2@1285.89,1897.39 ccw(c1315.8,1927.3) 1315.8,1885 cw(c1315.8,1927.3) C9.2@1285.89,1897.39 ; C9.2@1292.96,1904.46 ccw(c1339.94,1951.44) 1339.94,1885 cw(c1339.94,1951.44) C9.2@1292.96,1904.46 ; C9.2@1300.03,1911.53 ccw(c1364.08,1975.58) 1364.08,1885 cw(c1364.08,1975.58) C9.2@1300.03,1911.53 ; C9.2@1307.1,1918.6 ccw(c1388.23,1999.72) 1388.23,1885 cw(c1388.23,1999.72) C9.2@1307.1,1918.6 ; R10.1@1326.81,1475 ccw(c1343.25,1475) 1331.63,1463.37 cw(c1343.25,1475) R10.1@1326.81,1475 ; C10.1@1426.87,1559.57 cw(c1426.87,1461.24) 1496.4,1530.77 ccw(c1426.87,1461.24) C10.1@1426.87,1559.57 ; 1451.01,1559.57 cw(c1451.01,1485.39) 1503.47,1537.84 ccw(c1451.01,1485.39) 1451.01,1559.57 ; 1475.16,1559.57 cw(c1475.16,1509.53) 1510.54,1544.91 ccw(c1475.16,1509.53) 1475.16,1559.57 ; C11.2@1518.19,1628.94 cw(c1572.34,1628.94) 1534.05,1667.23 ccw(c1572.34,1628.94) C11.2@1518.19,1628.94 ; C11.2@1528.19,1628.94 cw(c1606.49,1628.94) 1551.12,1684.3 ccw(c1606.49,1628.94) C11.2@1528.19,1628.94 ; 1634,1821.93 cw(c1650.67,1821.93) 1638.88,1833.72 ccw(c1650.67,1821.93) 1634,1821.93 ; 1634,1826.68 cw(c1641.53,1826.68) 1638.91,1833.74 ccw(c1641.53,1826.68) 1634,1826.68 ; U1.47@1721.12,2166.28 ccw(c1711.49,2175.91) 1725.1,2175.91 cw(c1711.49,2175.91) U1.47@1721.12,2166.28 ; C16.2@1833.6,2715.77 cw(c1867.96,2681.41) 1867.96,2730 ccw(c1867.96,2681.41) C16.2@1833.6,2715.77 ; C16.2@1833.6,2742.1 ccw(c1862.82,2771.33) 1862.82,2730 cw(c1862.82,2771.33) C16.2@1833.6,2742.1 ; 1996.49,1828.08 cw(c1957.98,1789.57) 2012.44,1789.57 ccw(c1957.98,1789.57) 1996.49,1828.08 ; 2005.99,1818.57 ccw(c2031.06,1843.64) 2031.06,1808.19 cw(c2031.06,1843.64) 2005.99,1818.57 ; C8.2@2013.56,1811.01 cw(c1992.12,1789.57) 2022.44,1789.57 ccw(c1992.12,1789.57) C8.2@2013.56,1811.01
  Top Layer w20: 1228.5,2156.5 1277,2205 R1.2@1314.57,2205 C2.1@1314.57,2295 C3.1@1314.57,2375 1314.57,2390.43 1250,2455 1250,2650 1340,2740 ; C9.2@1290,1905.43 C9.2@1290,1915 ; C5.1@1315,2690.43 C4.1@1405,2690.43 ; C5.1@1329.72,2692.11 cw(c1343.4,2681.55) 1352.04,2696.52 ; P7.4@1339.54,2790.09 cw(c1372.6,2783.32) 1363.86,2815.92 ; P7.3@1340,2890 P7.4@1340,2790 ; P7.4@1340.09,2789.54 ccw(c1333.32,2822.6) 1365.92,2813.86 ; 1367.96,2696.52 cw(c1376.6,2681.55) C4.1@1390.28,2692.11 ; 1798.92,2405.08 cw(c1828.14,2394.58) P5.3@1824.95,2425.47 ; C1.2@1800.43,2335 1795,2340.43 1795,2384.94 ; 1805.08,2398.92 ccw(c1794.58,2428.14) P5.3@1825.47,2424.95 ; P5.3@1805.52,2423.61 cw(c1768.54,2420.97) 1795,2395 ; P5.3@1805.56,2423.14 cw(c1771.51,2419.88) 1795.47,2395.46 ; P5.3@1823.14,2405.56 ccw(c1819.88,2371.51) 1795.46,2395.47 ; P5.3@1823.61,2405.52 ccw(c1820.97,2368.54) 1795,2395 ; P5.3@1824.55,2425.13 cw(c1861.81,2414.19) 1851.75,2451.7 ; P5.3@1825.05,2424.53 ccw(c1821.99,2453.52) 1850.15,2445.97 ; 1880.22,2475.22 1825,2420 P5.3@1825,2425 1795,2395 ; 1880.43,2475 LED1.2@1880.43,2510 ; 1885.43,2480 1993.38,2480 2035.43,2522.06 R11.2@2035.43,2525 ; 1979.59,2670.34 ccw(c2034.46,2685.04) S1.1@2008.37,2634.58 ; S1.1@2035.43,2609.57 2018.43,2626.57 S1.1@2018.43,2635 ; R11.2@2040,2520.43 2040,2605 ; 2049,2685 2049,2665.57 S1.1@2018.43,2635 ; 1255,1950 cw(c1212.81,1907.8) 1272.45,1905.87 ccw(c1212.81,1907.8) 1255,1950 ; 1255,1950 C9.2@1290,1915 ; 1281.68,2205 cw(c1281.68,2172.11) 1304.93,2195.37 ccw(c1281.68,2172.11) 1281.68,2205 ; 1281.68,2205 ccw(c1281.68,2237.89) 1304.93,2214.63 cw(c1281.68,2237.89) 1281.68,2205 ; C9.2@1290,1915 cw(c1307.48,1932.48) 1287.98,1947.68 ccw(c1307.48,1932.48) C9.2@1290,1915 ; 1314.57,2258.18 cw(c1347.45,2258.18) 1324.2,2281.43 ccw(c1347.45,2258.18) 1314.57,2258.18 ; 1314.57,2258.18 ccw(c1281.68,2258.18) 1304.94,2281.43 cw(c1281.68,2258.18) 1314.57,2258.18 ; 1314.57,2331.82 cw(c1281.68,2331.82) 1304.94,2308.57 ccw(c1281.68,2331.82) 1314.57,2331.82 ; 1314.57,2331.82 ccw(c1347.45,2331.82) 1324.2,2308.57 cw(c1347.45,2331.82) 1314.57,2331.82 ; 1314.57,2338.18 cw(c1347.45,2338.18) 1324.2,2361.43 ccw(c1347.45,2338.18) 1314.57,2338.18 ; 1314.57,2338.18 ccw(c1281.68,2338.18) 1304.94,2361.43 cw(c1281.68,2338.18) 1314.57,2338.18 ; 1340,2740 ccw(c1364.14,2715.86) 1331.83,2704.83 cw(c1364.14,2715.86) 1340,2740 ; 1340,2740 P7.4@1340,2790 ; 1340,2742.86 cw(c1387.14,2742.86) 1353.81,2776.19 ccw(c1387.14,2742.86) 1340,2742.86 ; 1340,2742.86 ccw(c1292.86,2742.86) 1326.19,2776.19 cw(c1292.86,2742.86) 1340,2742.86 ; P7.4@1340,2790 1385.53,2835.53 1458.86,2835.53 1494.39,2800 1863.43,2800 1933.43,2730 2018.43,2645 S1.1@2018.43,2635 ; 1340,2837.14 cw(c1292.86,2837.14) 1326.19,2803.81 ccw(c1292.86,2837.14) 1340,2837.14 ; 1340,2837.14 ccw(c1387.14,2837.14) 1353.81,2803.81 cw(c1387.14,2837.14) 1340,2837.14 ; 1340,2842.86 cw(c1387.14,2842.86) 1353.81,2876.19 ccw(c1387.14,2842.86) 1340,2842.86 ; 1340,2842.86 ccw(c1292.86,2842.86) 1326.19,2876.19 cw(c1292.86,2842.86) 1340,2842.86 ; 1373.34,2823.34 cw(c1340,2856.67) 1340,2809.53 ccw(c1340,2856.67) 1373.34,2823.34 ; 1373.34,2823.34 ccw(c1406.67,2790) 1359.53,2790 cw(c1406.67,2790) 1373.34,2823.34 ; 1795,2384.94 ccw(c1846.44,2384.94) 1810.07,2348.57 cw(c1846.44,2384.94) 1795,2384.94 ; 1795,2384.94 1795,2395 ; 1795,2395 ccw(c1770.05,2420.42) 1805.54,2423.38 cw(c1770.05,2420.42) 1795.46,2395.47 ; 1795,2395 cw(c1820.42,2370.05) 1823.38,2405.54 ccw(c1820.42,2370.05) 1795.47,2395.46 ; 1795,2395 cw(c1820.68,2369.32) 1823.49,2405.53 ccw(c1820.68,2369.32) 1795,2395 ; 1795,2395 ccw(c1769.32,2420.68) 1805.53,2423.49 cw(c1769.32,2420.68) 1795,2395 ; 1880.43,2488.18 cw(c1913.32,2488.18) 1890.07,2511.43 ccw(c1913.32,2488.18) 1880.43,2488.18 ; 1880.43,2488.18 ccw(c1847.55,2488.18) 1870.8,2511.43 cw(c1847.55,2488.18) 1880.43,2488.18 ; 1269.66,2669.66 cw(c1311.06,2628.26) 1311.06,2686.81 ccw(c1311.06,2628.26) 1269.66,2669.66 ; 1283.19,2421.81 cw(c1240.31,2378.94) 1300.95,2378.94 ccw(c1240.31,2378.94) 1283.19,2421.81 ; R1.2@1304.93,2218.57 ccw(c1281.67,2241.83) 1314.57,2241.83 cw(c1281.67,2241.83) R1.2@1304.93,2218.57 ; 1314.57,2241.82 ccw(c1347.45,2241.82) 1324.2,2218.57 cw(c1347.45,2241.82) 1314.57,2241.82 ; C5.1@1328.57,2710.07 ccw(c1375.97,2757.46) 1375.97,2690.43 cw(c1375.97,2757.46) C5.1@1328.57,2710.07 ; 1344.03,2690.43 ccw(c1344.03,2757.46) 1391.43,2710.07 cw(c1344.03,2757.46) 1344.03,2690.43 ; P5.3@1825,2444.53 ccw(c1825,2503.74) 1866.87,2461.87 cw(c1825,2503.74) P5.3@1825,2444.53 ; P5.3@1844.53,2425 cw(c1879.6,2425) 1854.8,2449.8 ccw(c1879.6,2425) P5.3@1844.53,2425 ; 1961.22,2702.21 cw(c1894.01,2635) 1989.06,2635 ccw(c1894.01,2635) 1961.22,2702.21 ; 1995.36,2668.07 cw(c1962.29,2635) 2009.06,2635 ccw(c1962.29,2635) 1995.36,2668.07 ; 2010.48,2497.11 cw(c2035.43,2472.15) 2035.43,2507.44 ccw(c2035.43,2472.15) 2010.48,2497.11 ; R11.2@2012.88,2499.51 ccw(c1991.33,2521.06) 2021.81,2521.06 cw(c1991.33,2521.06) R11.2@2012.88,2499.51 ; R11.2@2025.8,2538.57 ccw(c1991.52,2572.85) 2040,2572.85 cw(c1991.52,2572.85) R11.2@2025.8,2538.57 ; S1.1@2027.68,2615.48 cw(c2027.3,2602.79) 2040,2602.79 ccw(c2027.3,2602.79) S1.1@2027.68,2615.48
  Top Layer w25: 1228.5,2241.5 1228.5,2156.5 1228.5,1981.5 1250,1960 ; v1@1509.57,1580 C11.2@1509.57,1625 ; C12.2@1510,1540.43 v1@1510,1580 ; 1513.27,1594.46 cw(c1533.27,1599.82) C11.2@1517.85,1613.64 ; C12.2@1514.15,1562.79 cw(c1537.21,1562.79) v1@1520.9,1579.1 ; v1@1514.15,1568.26 ccw(c1532.33,1563.39) C12.2@1518.02,1551.16 ; U3.2@1900,1622.4 1918.29,1622.4 1975.35,1565.35 ; 1957.5,1492.5 1965,1500 ; v1@1982.38,1518.83 cw(c2000.85,1508.16) v1@1995.33,1528.76 ; v1@1983.29,1519.53 cw(c2000.46,1509.61) v1@1995.33,1528.76 ; v1@1985,1513.69 1985,1520 ; 1988.64,1498.99 cw(c1979.9,1483.85) J1.4@1996.78,1488.38 ; v1@1988.75,1529.87 cw(c1958.91,1537.86) 1974.36,1511.11 ccw(c1956.71,1541.68) v1@1990.81,1532.54 ; 1990,1550 1990,1550.69 ; v1@1998.69,1533.69 v1(1995,1530) 1985,1520 ; v1@2005,1550 v1(2015,1550) ; 2015,2475 2025,2475 2045,2495 ; C12.2@1501.7,1551.8 ccw(c1482.72,1570.79) 1509.57,1570.79 ; C12.2@1501.7,1551.8 ccw(c1482.72,1570.79) 1509.57,1570.79 ; C12.2@1501.7,1551.8 ccw(c1481.67,1571.84) 1510,1571.84 cw(c1481.67,1571.84) C12.2@1501.7,1551.8 ; C12.2@1501.7,1551.8 ccw(c1482.72,1570.79) 1509.57,1570.79 ; C12.2@1501.7,1551.8 ccw(c1482.72,1570.79) 1509.57,1570.79 ; C12.2@1506.96,1561.07 cw(c1535.32,1553.47) v1@1520.64,1578.89 ; C12.2@1506.96,1561.07 cw(c1535.32,1553.47) v1@1520.64,1578.89 ; C12.2@1506.96,1561.07 cw(c1535.32,1553.47) v1@1520.64,1578.89 ; C12.2@1506.96,1561.07 cw(c1535.32,1553.47) v1@1520.64,1578.89 ; C12.2@1506.96,1561.07 cw(c1535.32,1553.47) v1@1520.64,1578.89 ; C12.2@1506.96,1561.07 cw(c1535.32,1553.47) v1@1520.64,1578.89 ; C12.2@1506.96,1561.07 cw(c1535.32,1553.47) v1@1520.64,1578.89 ; C12.2@1506.96,1561.07 cw(c1535.32,1553.47) v1@1520.64,1578.89 ; C12.2@1506.96,1561.07 cw(c1535.32,1553.47) v1@1520.64,1578.89 ; C12.2@1506.96,1561.07 cw(c1535.32,1553.47) v1@1520.64,1578.89 ; C12.2@1506.96,1561.07 cw(c1535.32,1553.47) v1@1520.64,1578.89 ; C12.2@1506.96,1561.07 cw(c1535.32,1553.47) v1@1520.64,1578.89 ; C12.2@1507.2,1561.37 cw(c1535.07,1553.9) v1@1520.64,1578.89 ; C12.2@1507.2,1561.37 cw(c1535.07,1553.9) v1@1520.64,1578.89 ; C12.2@1507.2,1561.37 cw(c1535.07,1553.9) v1@1520.64,1578.89 ; 1509.57,1570.79 ccw(c1536.42,1570.79) C12.2@1517.43,1551.8 ; 1509.57,1570.79 ccw(c1536.42,1570.79) C12.2@1517.43,1551.8 ; 1509.57,1570.79 ccw(c1536.42,1570.79) C12.2@1517.43,1551.8 ; 1509.57,1570.79 ccw(c1536.42,1570.79) C12.2@1517.43,1551.8 ; 1509.57,1594.21 cw(c1536.42,1594.21) 1517.43,1613.2 ccw(c1536.42,1594.21) 1509.57,1594.21 ; 1509.57,1594.21 ccw(c1482.72,1594.21) 1501.7,1613.2 cw(c1482.72,1594.21) 1509.57,1594.21 ; C12.2@1517.43,1551.8 cw(c1535.37,1569.74) 1510,1569.74 ccw(c1535.37,1569.74) C12.2@1517.43,1551.8 ; v1@1520.9,1579.1 ccw(c1547.23,1552.77) 1510,1552.77 cw(c1547.23,1552.77) v1@1520.9,1579.1 ; 1965,1500 1998.69,1500 ; 1965,1500 v1(1975,1510) ; v1(1975,1510) 1975,1565 ; v1(1975,1510) 1985,1520 ; 1975,1565 ccw(c2013.14,1565) 1995.59,1531.14 cw(c2013.14,1565) 1975,1565 ; 1975,1565 1975.35,1565.35 ; 1975.35,1565.34 ccw(c2009.92,1599.92) 2014.87,1551.27 cw(c2009.92,1599.92) 1975.35,1565.34 ; 1975.35,1565.35 1990,1550.69 ; v1@1976.11,1510.64 ccw(c2009.23,1529.76) J1.4@1999.33,1492.82 ; v1@1976.11,1510.64 ccw(c2009.23,1529.76) J1.4@1999.33,1492.82 ; v1@1976.11,1510.64 ccw(c2009.23,1529.76) J1.4@1999.33,1492.82 ; 1990,1545.16 ccw(c2010.16,1545.16) v1@1995.9,1530.9 ; 1990,1545.16 ccw(c2010.16,1545.16) v1@1995.9,1530.9 ; 1990,1545.16 ccw(c2010.16,1545.16) v1@1995.9,1530.9 ; 1990,1545.16 ccw(c2010.16,1545.16) v1@1995.9,1530.9 ; 1990,1550.69 cw(c1977.1,1537.79) 1993.83,1530.51 ccw(c1977.1,1537.79) 1990,1550.69 ; v1@1995.35,1528.77 ccw(c2003.16,1501.72) 1975,1501.72 cw(c2003.16,1501.72) v1@1995.35,1528.77 ; 1998.69,1500 cw(c1998.69,1529.23) 1975.99,1510.81 ccw(c1998.69,1529.23) 1998.69,1500 ; C11.2@1509.57,1608.28 ccw(c1548.28,1608.28) 1520.9,1580.9 cw(c1548.28,1608.28) C11.2@1509.57,1608.28 ; U3.2@1909.84,1625.06 cw(c1909.84,1611.08) 1919.72,1620.97 ccw(c1909.84,1611.08) U3.2@1909.84,1625.06 ; v1@1972.54,1500 cw(c1972.54,1467.4) 1995.59,1490.45 ccw(c1972.54,1467.4) v1@1972.54,1500 ; 1981.72,1558.97 cw(c1952.75,1530) 1993.72,1530 ccw(c1952.75,1530) 1981.72,1558.97 ; v1@1985,1510.87 cw(c2005.59,1510.87) 1995.62,1528.88 ccw(c2005.59,1510.87) v1@1985,1510.87 ; v1@1985,1515.86 cw(c1998.23,1515.86) 1995.28,1528.75 ccw(c1998.23,1515.86) v1@1985,1515.86
  Top Layer w30: 1250,1960 v1@1345,1960 ; 1277.5,1932.5 v1@1295,1950 ; v1(1345,1950) v1(1315,1950) v1@1295,1950 ; v1@1295,1950 cw(c1305.9,1939.1) 1315.78,1950.94 ccw(c1305.9,1939.1) v1@1295,1950 ; 1263.8,1960 cw(c1263.8,1928.8) 1285.86,1950.86 ccw(c1263.8,1928.8) 1263.8,1960 ; 1280.01,1935.01 ccw(c1265.02,1950) 1286.22,1950 cw(c1265.02,1950) 1280.01,1935.01 ; v1@1282.94,1937.94 cw(c1315,1905.88) 1315,1951.22 ccw(c1315,1905.88) v1@1282.94,1937.94 ; v1@1284.14,1950.86 cw(c1306.2,1928.8) 1306.2,1960 ccw(c1306.2,1928.8) v1@1284.14,1950.86 ; v1@1293.8,1960 cw(c1293.8,1928.8) 1315.86,1950.86 ccw(c1293.8,1928.8) v1@1293.8,1960 ; v1@1314.14,1950.86 cw(c1336.2,1928.8) 1336.2,1960 ccw(c1336.2,1928.8) v1@1314.14,1950.86 ; v1@1323.8,1960 cw(c1323.8,1928.8) 1345.86,1950.86 ccw(c1323.8,1928.8) v1@1323.8,1960
  Bottom Layer w10: 1414.57,1427.44 1417.65,1430.53 1442.28,1430.53 1443.19,1431.44 ; pad.1@1445,1515 1500,1515 1525,1490 U4.2@1577.6,1490 ; pad.1@1470,1555 pad.1@1477.5,1547.5 ; 1557.19,1490 cw(c1557.19,1469.44) 1571.73,1483.98 ccw(c1557.19,1469.44) 1557.19,1490
  Bottom Layer w20: 1340,2725 P7.4@1340,2790 P7.4@1350,2790 ; 1490,2740 1505,2755 v1(1520,2755) 1520,2740 1520,2735 v1(1555,2700) v1@1575,2680 ; 1580,2650 v1(1580,2680)
  Bottom Layer w25: v1(1285,1950) 1295,1960 ; 1361.36,1437.02 ccw(c1344.92,1498.39) R12.1@1399.94,1466.62 ; 1492.5,2007.5 1392.5,2007.5 1345,1960 1295,1960 ; 1496.85,2008.15 1655,1850 1655,1695 1540,1580 1510,1580 1477.5,1547.5 1445,1515 1340,1410 P3.4@1340,1390 1340,1335 1435,1240 1945,1240 1995,1290 v1(1995,1530) v1(2015,1550) ; 1295,1960 cw(c1295,1937.91) 1313.91,1949.34 ccw(c1295,1937.91) 1295,1960 ; 1340,1348.89 cw(c1381.11,1348.89) 1352.04,1377.96 ccw(c1381.11,1348.89) 1340,1348.89 ; 1340,1348.89 ccw(c1298.89,1348.89) 1327.96,1377.96 cw(c1298.89,1348.89) 1340,1348.89 ; R12.1@1420.31,1471.82 cw(c1453.53,1480.72) 1423.75,1497.91 ; R12.1@1420.31,1471.82 cw(c1453.53,1480.72) 1423.75,1497.91 ; R12.1@1420.31,1471.82 cw(c1453.53,1480.72) 1423.75,1497.91 ; v1@1285.9,1949.1 cw(c1312.23,1922.77) 1312.23,1960 ccw(c1312.23,1922.77) v1@1285.9,1949.1 ; v1@1315.9,1949.1 cw(c1342.23,1922.77) 1342.23,1960 ccw(c1342.23,1922.77) v1@1315.9,1949.1 ; v1@1317.77,1960 cw(c1317.77,1922.77) 1344.1,1949.1 ccw(c1317.77,1922.77) v1@1317.77,1960 ; v1@1346.28,1950 cw(c1373.51,1950) 1354.26,1969.26 ccw(c1373.51,1950) v1@1346.28,1950 ; P3.4@1357.03,1390 cw(c1446.42,1390) 1383.21,1453.21 ccw(c1446.42,1390) P3.4@1357.03,1390 ; 1358.99,1428.99 cw(c1409.57,1378.42) 1409.57,1449.94 ccw(c1409.57,1378.42) 1358.99,1428.99 ; R12.1@1418.05,1488.05 ccw(c1371.11,1535) 1437.5,1535 cw(c1371.11,1535) R12.1@1418.05,1488.05 ; R12.1@1420.69,1468.94 cw(c1473.2,1468.94) 1436.07,1506.07 ccw(c1473.2,1468.94) R12.1@1420.69,1468.94 ; pad.1@1460,1547.5 ccw(c1460,1589.75) 1489.87,1559.87 cw(c1460,1589.75) pad.1@1460,1547.5 ; 1500.74,1570.74 cw(c1520,1551.49) 1520,1578.72 ccw(c1520,1551.49) 1500.74,1570.74 ; v1@1520,1581.28 ccw(c1520,1632.65) 1556.33,1596.33 cw(c1520,1632.65) v1@1520,1581.28 ; v1@1974.1,1509.1 cw(c1923.63,1458.63) 1995,1458.63 ccw(c1923.63,1458.63) v1@1974.1,1509.1
  Bottom Layer w30: 1520,2740 v1(1580,2680)
  other v1: 1520,1580 1680,1925 1640,1960 1720,1960 1605,2000 1755,2000 1640,2040 1720,2040 1680,2075
  other v2: 1478,2242 1562,2301
NetD1_1: D1.1 pad.1@1550,1535 U4.3 | length 351.1
  Bottom Layer w10: U4.3@1585,1524.8 1585,1585 1625,1625 ; D1.1@1679.57,1625 1625,1625 ; 1585,1536.49 cw(c1573.31,1536.49) 1581.58,1528.23 ccw(c1573.31,1536.49) 1585,1536.49 ; 1585,1536.49 ccw(c1596.69,1536.49) 1588.42,1528.23 cw(c1596.69,1536.49) 1585,1536.49 ; 1625,1625 cw(c1625,1587.4) 1658.15,1605.15 ccw(c1625,1587.4) 1625,1625 ; 1641.7,1625 cw(c1641.7,1596.34) 1666.97,1609.87 ccw(c1641.7,1596.34) 1641.7,1625
NetD1_2: D1.2 D2.2 U3.1 U3.3 | length 616
  Top Layer w10: v1(1773,1610) 1850,1610 1860,1600 ; 1794.2,1610 cw(c1794.2,1631.2) 1779.21,1616.21 ccw(c1794.2,1631.2) 1794.2,1610 ; 1794.2,1610 ccw(c1794.2,1588.8) 1779.21,1603.79 cw(c1794.2,1588.8) 1794.2,1610
  Top Layer w25: U3.1@1900,1585 1875,1585 ; 1948.41,1654.52 ccw(c1958.45,1671.92) D2.2@1972.04,1657.13 ; D2.2@1979.57,1645 1964.76,1659.8 U3.3@1900,1659.8 1879.8,1659.8 1860,1640 1860,1600 1875,1585 ; 1875,1585 ccw(c1884.77,1594.77) 1891.44,1582.67 cw(c1884.77,1594.77) 1875,1585 ; 1868.82,1591.18 ccw(c1890.16,1612.52) 1890.16,1582.34 cw(c1890.16,1612.52) 1868.82,1591.18 ; 1877.02,1657.02 cw(c1890.16,1643.88) 1890.16,1662.46 ccw(c1890.16,1643.88) 1877.02,1657.02 ; 1926.48,1659.8 cw(c1926.48,1595.85) 1971.7,1641.07 ccw(c1926.48,1595.85) 1926.48,1659.8
NetJ1_2: J1.2 R7.2 | length 389.1
  Top Layer w10: R7.2@1864.11,1354.31 cw(c1898.01,1344.85) 1888.9,1378.85 ; R7.2@1865.43,1350 1925.84,1410.41 J1.2@2004.13,1410.41 ; R7.2@1865.43,1362.56 ccw(c1865.43,1392.88) 1886.87,1371.44 cw(c1865.43,1392.88) R7.2@1865.43,1362.56 ; R7.2@1865.43,1372.56 ccw(c1865.43,1427.02) 1903.94,1388.51 cw(c1865.43,1427.02) R7.2@1865.43,1372.56 ; R7.2@1884.06,1353.94 cw(c1919.51,1353.94) 1894.44,1379.01 ccw(c1919.51,1353.94) R7.2@1884.06,1353.94
NetJ1_3: J1.3 R5.1 R6.2 | length 921.9
  Top Layer w10: R6.2@1858.39,1451.18 ccw(c1853.66,1462.75) 1865.74,1465.99 ; R6.2@1865,1430 R6.2@1870,1435 ; R5.1@1865,1510 1870,1505 R6.2@1870,1435 ; 1867.46,1459.56 ccw(c1882.56,1463.61) R6.2@1874.74,1450.06 ; J1.3@2004.13,1436 1871,1436 R6.2@1870,1435 ; R5.1@1858.39,1488.82 cw(c1853.67,1477.25) 1865.74,1474.02 ; R5.1@1858.39,1488.82 cw(c1853.67,1477.25) 1865.74,1474.02 ; R5.1@1858.39,1488.82 cw(c1853.67,1477.25) 1865.74,1474.02 ; 1867.46,1480.45 cw(c1882.56,1476.4) R5.1@1874.74,1489.94 ; 1867.46,1480.45 cw(c1882.56,1476.4) R5.1@1874.74,1489.94 ; 1867.46,1480.45 cw(c1882.56,1476.4) R5.1@1874.74,1489.94 ; R6.2@1878.6,1447.1 ccw(c1905.41,1473.91) 1905.41,1436 cw(c1905.41,1473.91) R6.2@1878.6,1447.1 ; R6.2@1878.6,1447.1 cw(c1899.37,1467.87) 1870,1467.87 ccw(c1899.37,1467.87) R6.2@1878.6,1447.1 ; R6.2@1852.27,1447.1 ccw(c1809.45,1489.92) 1870,1489.92 cw(c1809.45,1489.92) R6.2@1852.27,1447.1 ; R5.1@1852.26,1492.9 cw(c1809.45,1450.08) 1870,1450.08 ccw(c1809.45,1450.08) R5.1@1852.26,1492.9 ; R6.2@1859.34,1440.03 ccw(c1833.6,1465.78) 1870,1465.78 cw(c1833.6,1465.78) R6.2@1859.34,1440.03 ; R5.1@1859.34,1499.97 cw(c1833.59,1474.22) 1870,1474.22 ccw(c1833.59,1474.22) R5.1@1859.34,1499.97 ; 1870,1472.13 cw(c1899.36,1472.13) 1878.6,1492.9 ccw(c1899.36,1472.13) 1870,1472.13 ; R6.2@1871.53,1427.84 cw(c1891.23,1408.14) 1891.23,1436 ccw(c1891.23,1408.14) R6.2@1871.53,1427.84 ; R6.2@1878.6,1420.77 cw(c1915.37,1384) 1915.37,1436 ccw(c1915.37,1384) R6.2@1878.6,1420.77
NetLED1_1: LED1.1 R8.2 | length 84.1
  Top Layer w10: R8.2@1725.43,2525 LED1.1@1809.57,2525
NetR12_2: R12.2 U4.5 | length 637.2
  Bottom Layer w6: R12.2@1480.43,1465 1525,1465 ; U4.5@1679.49,1450 1678.53,1449.04 1678.53,1356.74 1673.26,1351.47 1606.74,1351.47 1595,1363.22 1595,1395 1525,1465 ; 1512.03,1465 cw(c1512.03,1491.83) 1491.58,1474.46 ccw(c1512.03,1491.83) 1512.03,1465 ; 1512.03,1465 ccw(c1512.03,1438.17) 1491.58,1455.54 cw(c1512.03,1438.17) 1512.03,1465 ; 1525,1465 cw(c1525,1502.84) 1496.15,1478.35 ccw(c1525,1502.84) 1525,1465 ; 1525,1465 ccw(c1525,1427.16) 1496.15,1451.65 cw(c1525,1427.16) 1525,1465 ; U4.5@1674.65,1445.16 cw(c1665.29,1435.8) 1678.53,1435.8 ccw(c1665.29,1435.8) U4.5@1674.65,1445.16 ; 1678.53,1431.16 cw(c1698.33,1431.16) 1684.33,1445.16 ccw(c1698.33,1431.16) 1678.53,1431.16
  Bottom Layer w10: U4.5@1679.49,1450 U4.5@1680.53,1448.96
OSCI: C4.2 R2.1 U1.5 U2.5 Y2.1 | length 774.7
  Top Layer w6: U2.5@1563.36,2211.56 1585,2189.92 1585,2136.76 U1.5@1602.75,2119.01 U1.5@1602.75,2121.5
  Top Layer w10: C4.2@1405,2619.57 1405,2610 Y2.1@1515,2500 1456,2441 1456,2319 1460,2315 1460,2314.92 U2.5@1563.36,2211.56
  Bottom Layer w10: R2.1@1440.43,2610 1515,2535.43 Y2.1@1515,2500
OSCO: C5.2 R2.2 U1.6 U2.6 Y2.2 | length 840.7
  Top Layer w6: U2.6@1549.44,2197.64 1549.44,2195.26 1571.81,2172.88 1571.81,2122.11 U1.6@1588.83,2105.09 ; U2.6@1565.58,2183.5 ccw(c1576.17,2183.5) 1568.68,2176.01 cw(c1576.17,2183.5) U2.6@1565.58,2183.5
  Top Layer w10: C5.2@1315,2619.57 Y2.2@1315,2500 1375,2500 1440,2435 1440,2312.29 1528.65,2223.65 ; U2.6@1549.44,2197.64 1528.65,2218.43 1528.65,2223.65 ; 1528.65,2223.64 ccw(c1542.55,2223.64) 1535.3,2211.78 cw(c1542.55,2223.64) 1528.65,2223.64
  Bottom Layer w10: Y2.2@1315,2500 1369.57,2554.57 R2.2@1369.57,2610